# Altium PCB STM32F303VCT6_PLC.PcbDoc (part 1 of 3)
Units mm, origin at the board's own origin, x right, y up, seen from the top; angles counter-clockwise.
Board outline 150 x 150 mm, 4 copper layers ([L1] TOP, [L2] GND, [L3] POWER, [L4] BOTTOM), stack 1.58 mm thick; 269 components, 235 nets, 934 pads, 331 vias.
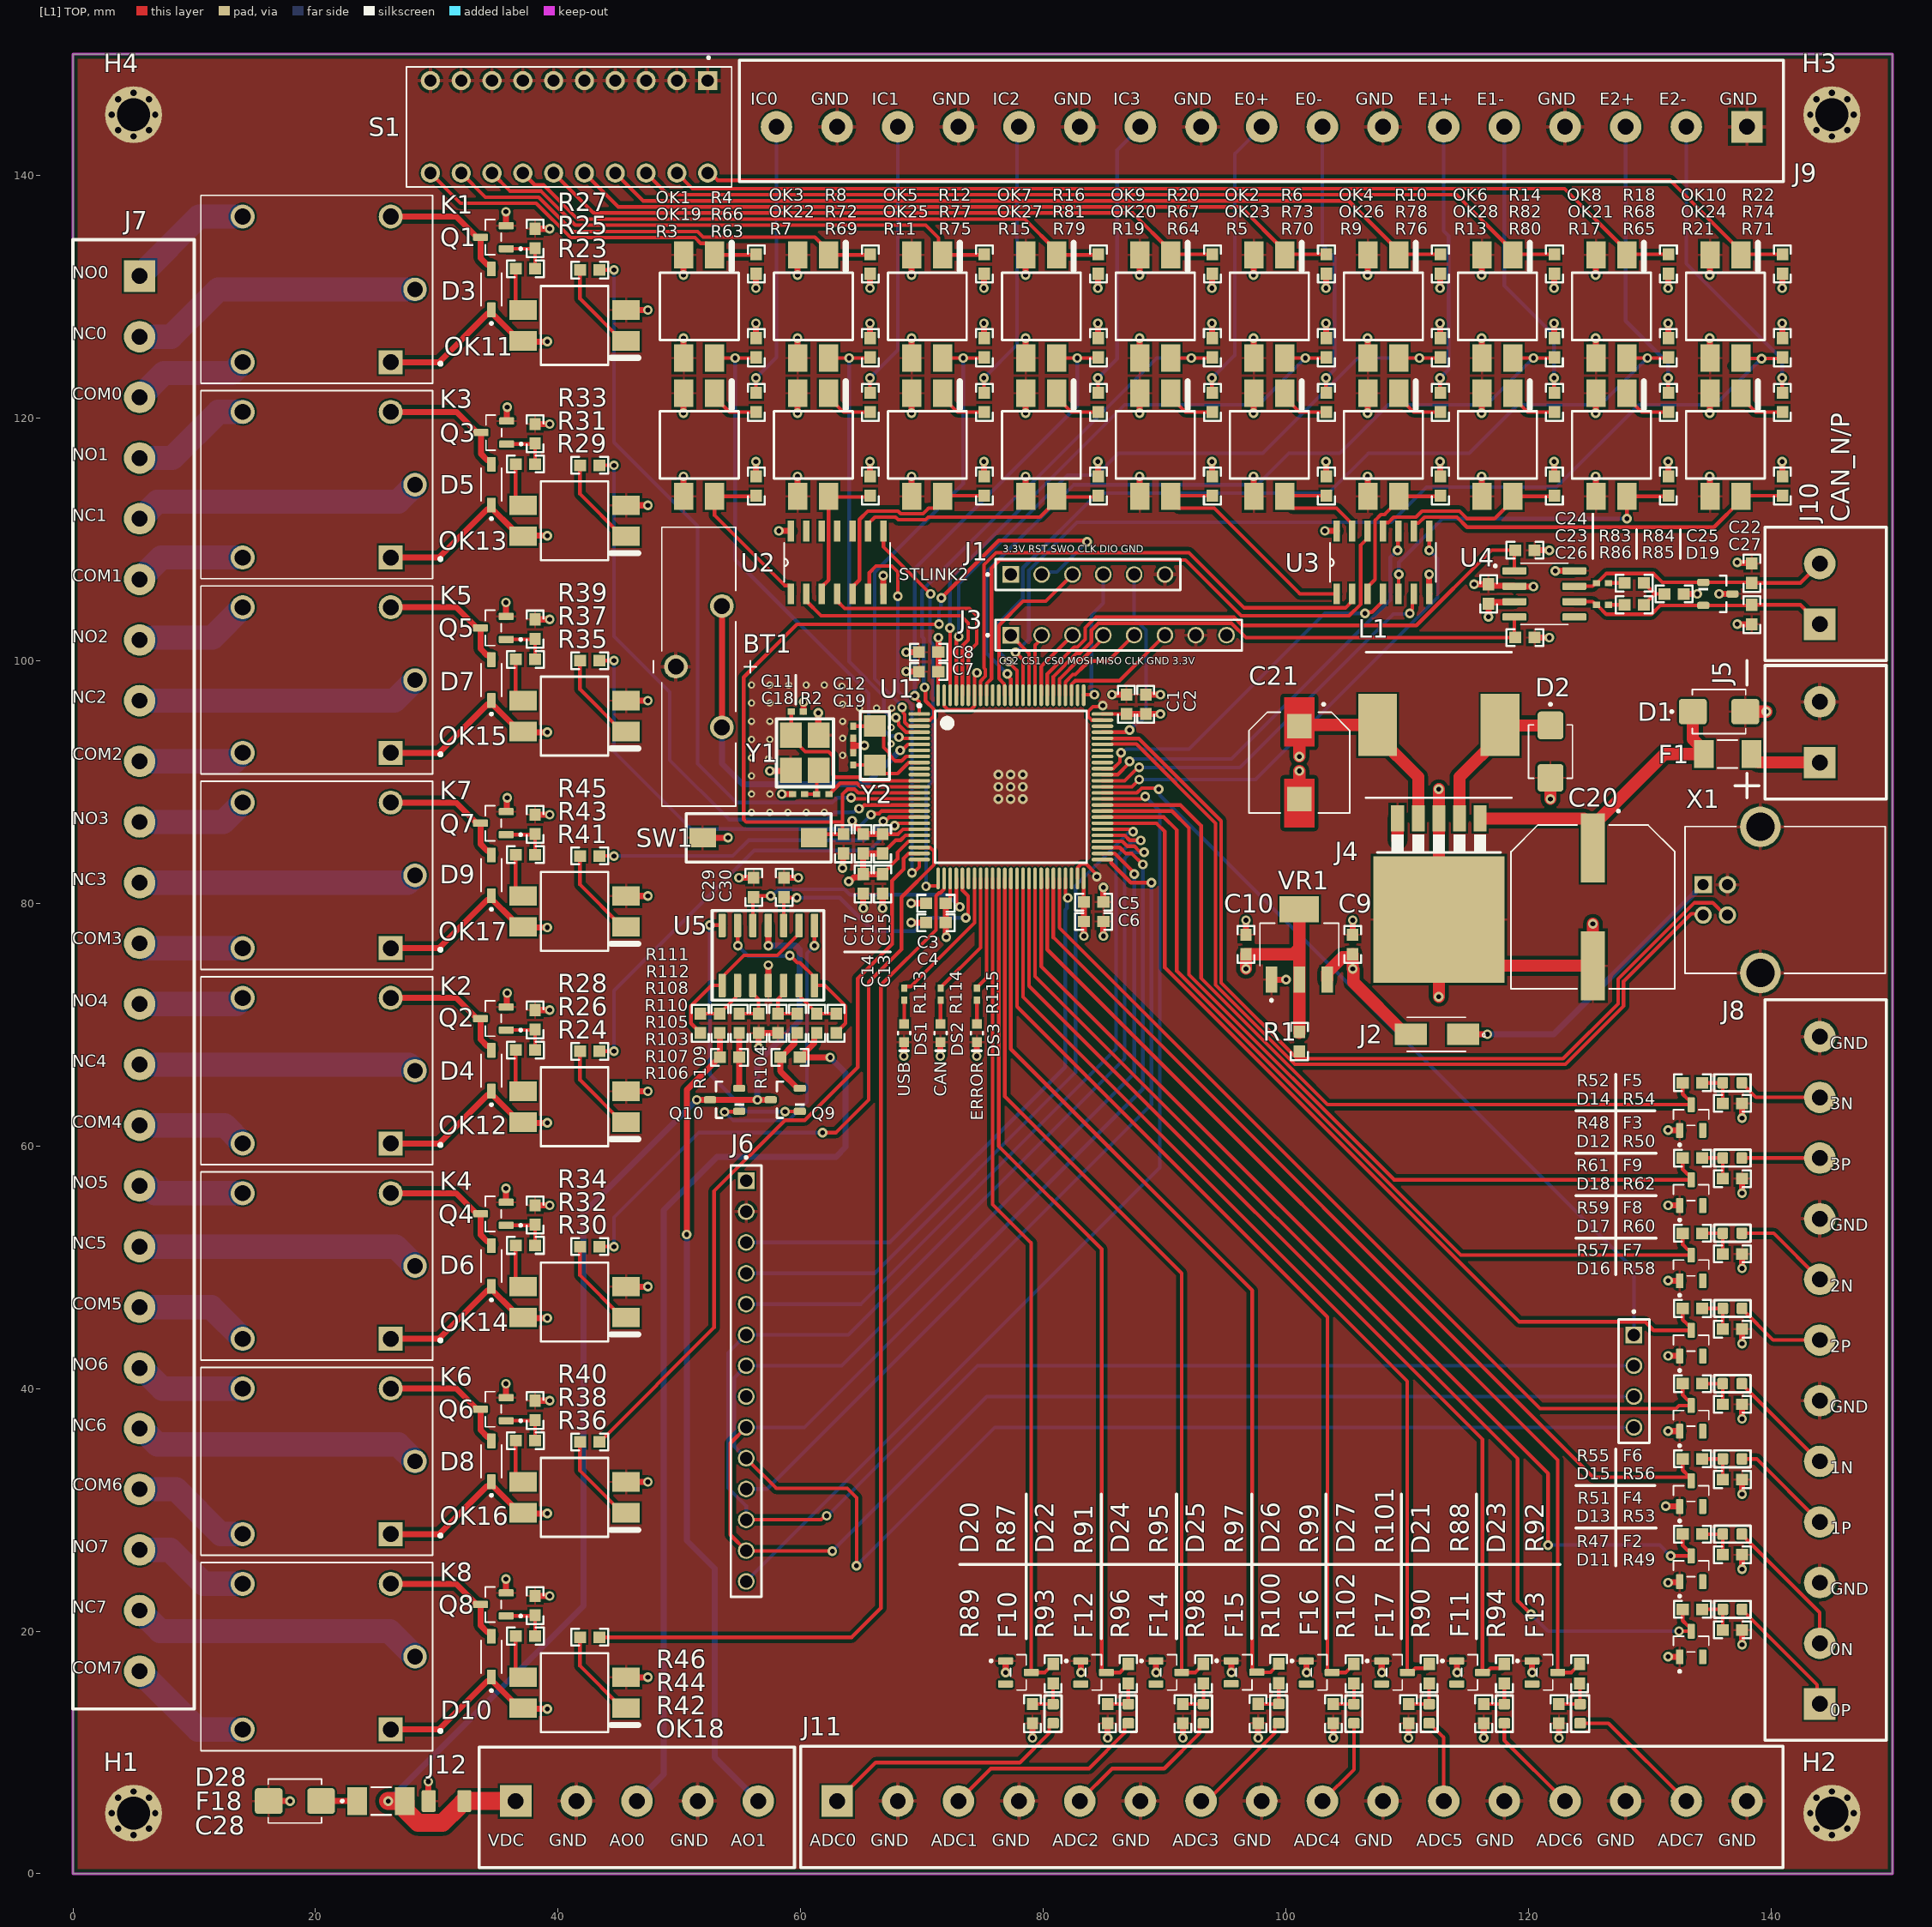
[diagram p0: [L1] TOP view]
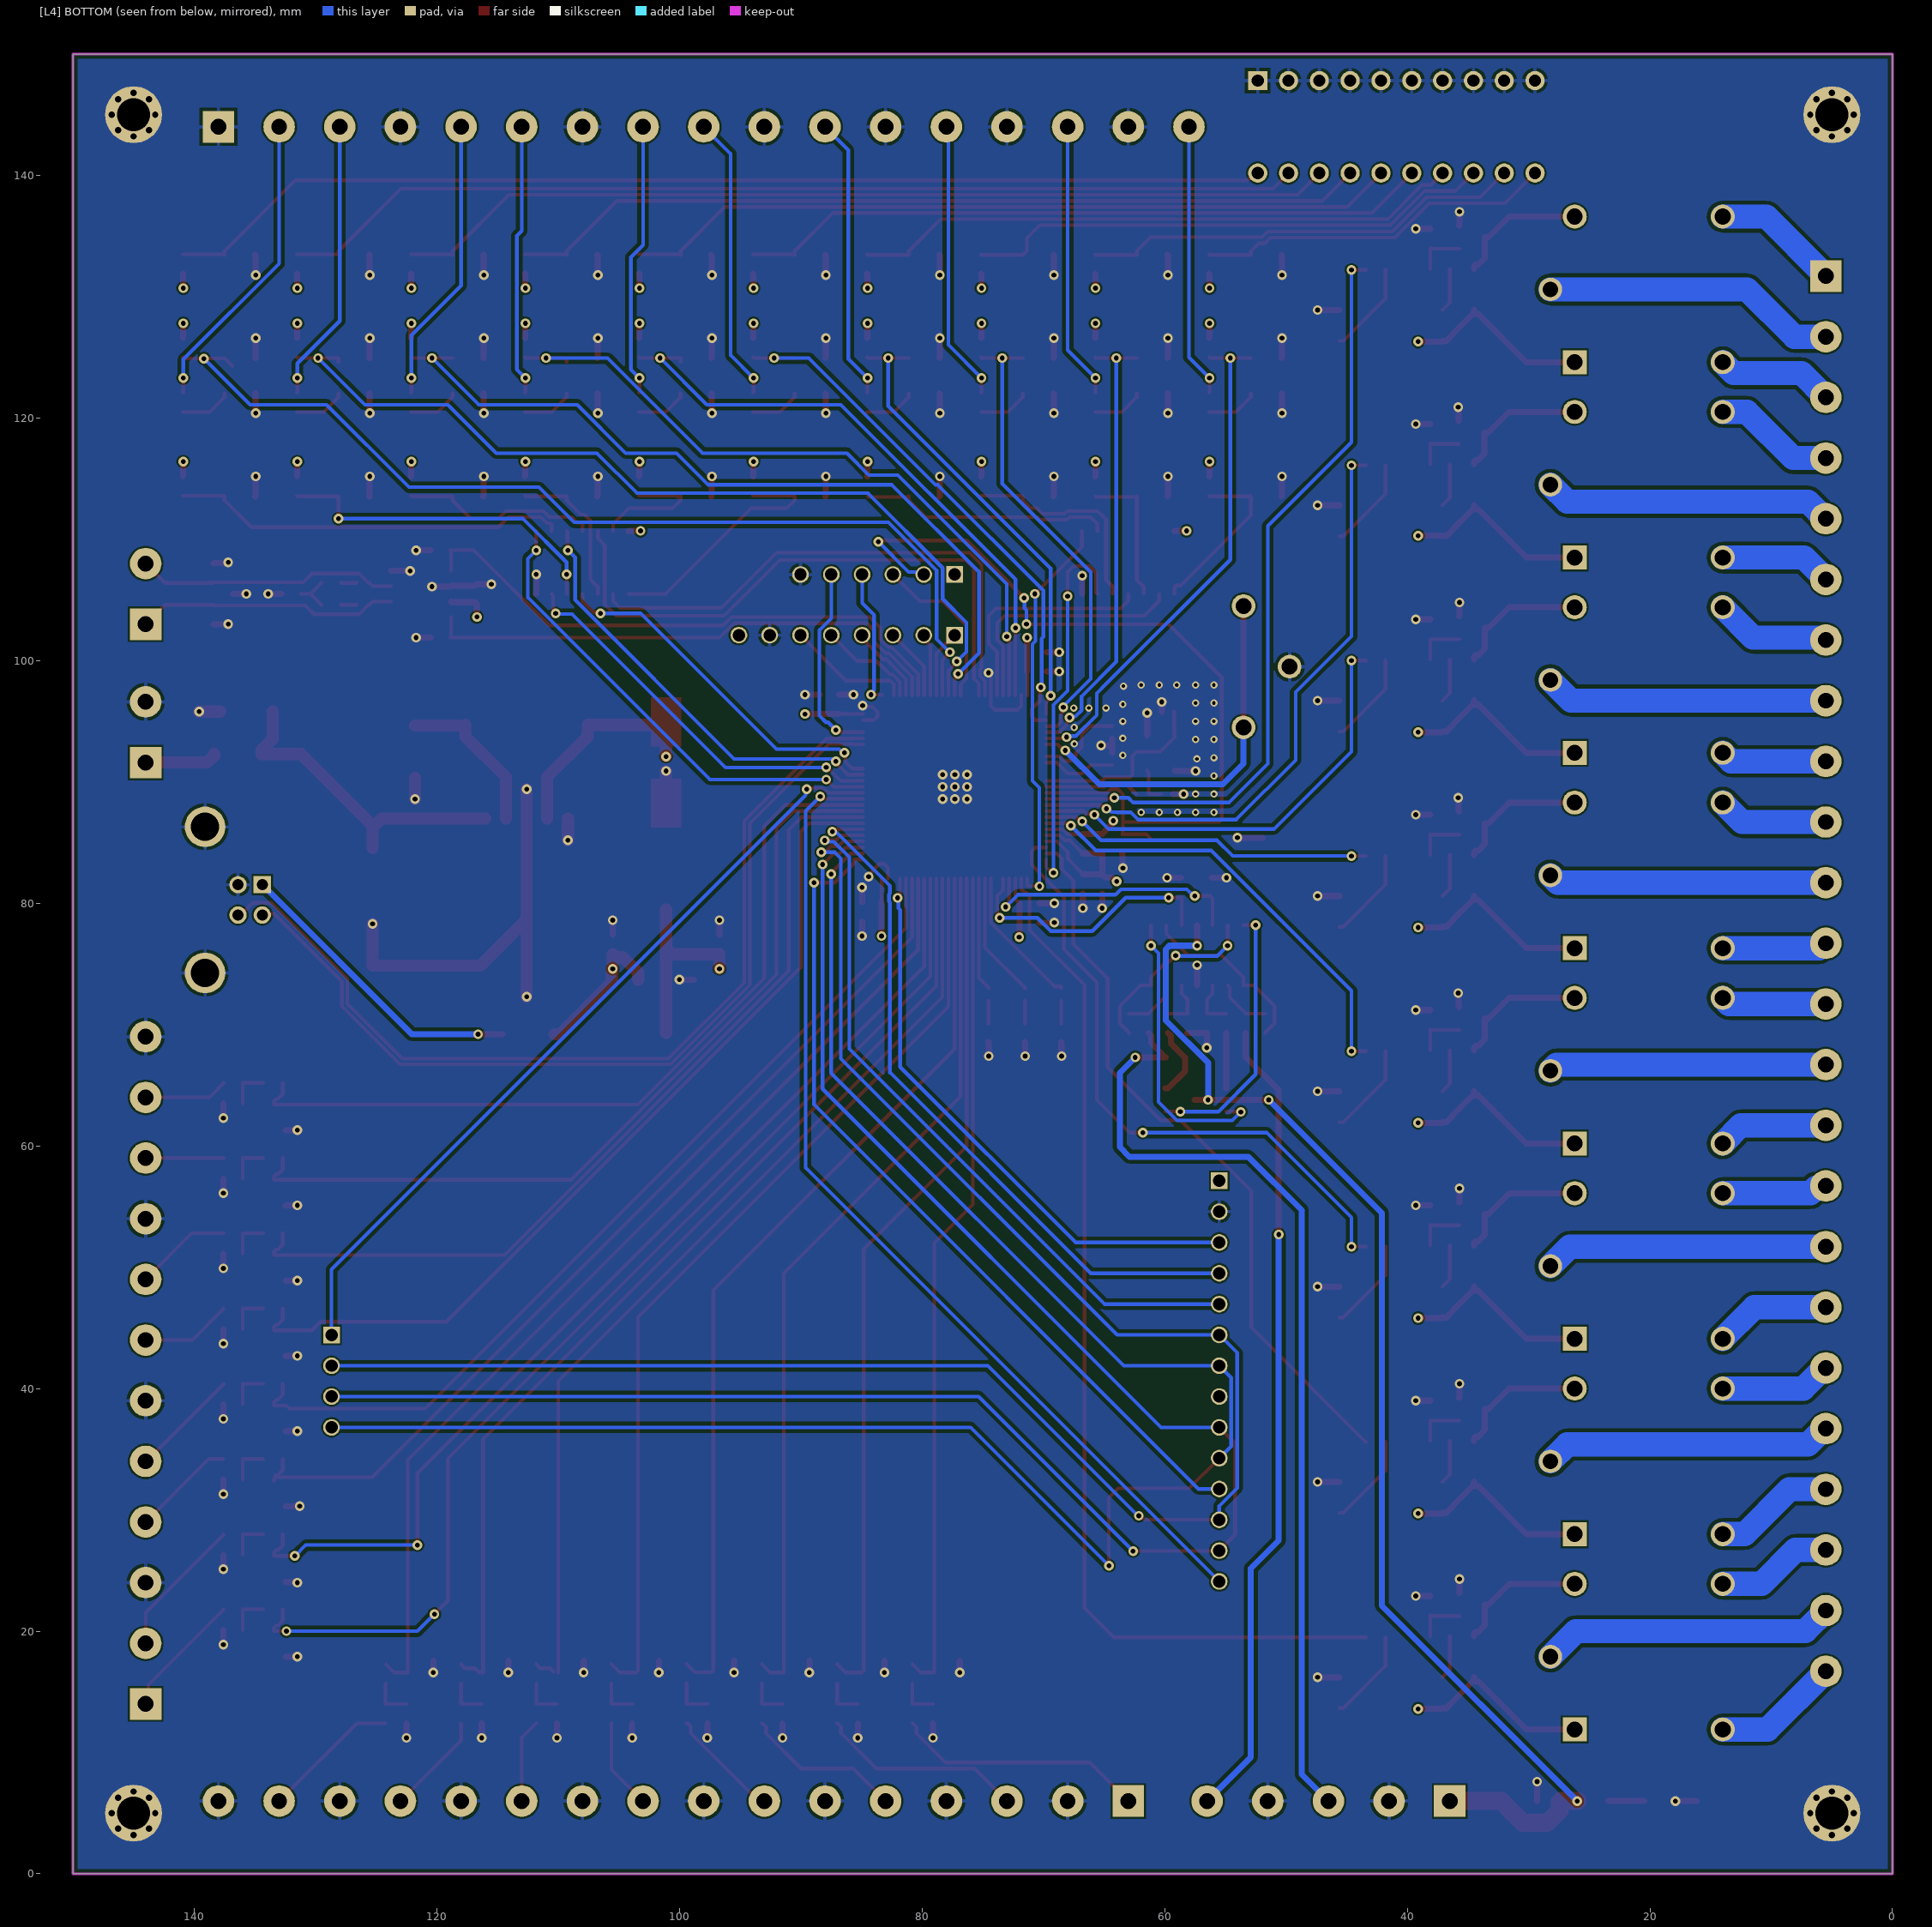
[diagram p1: [L4] BOTTOM view, seen from below]
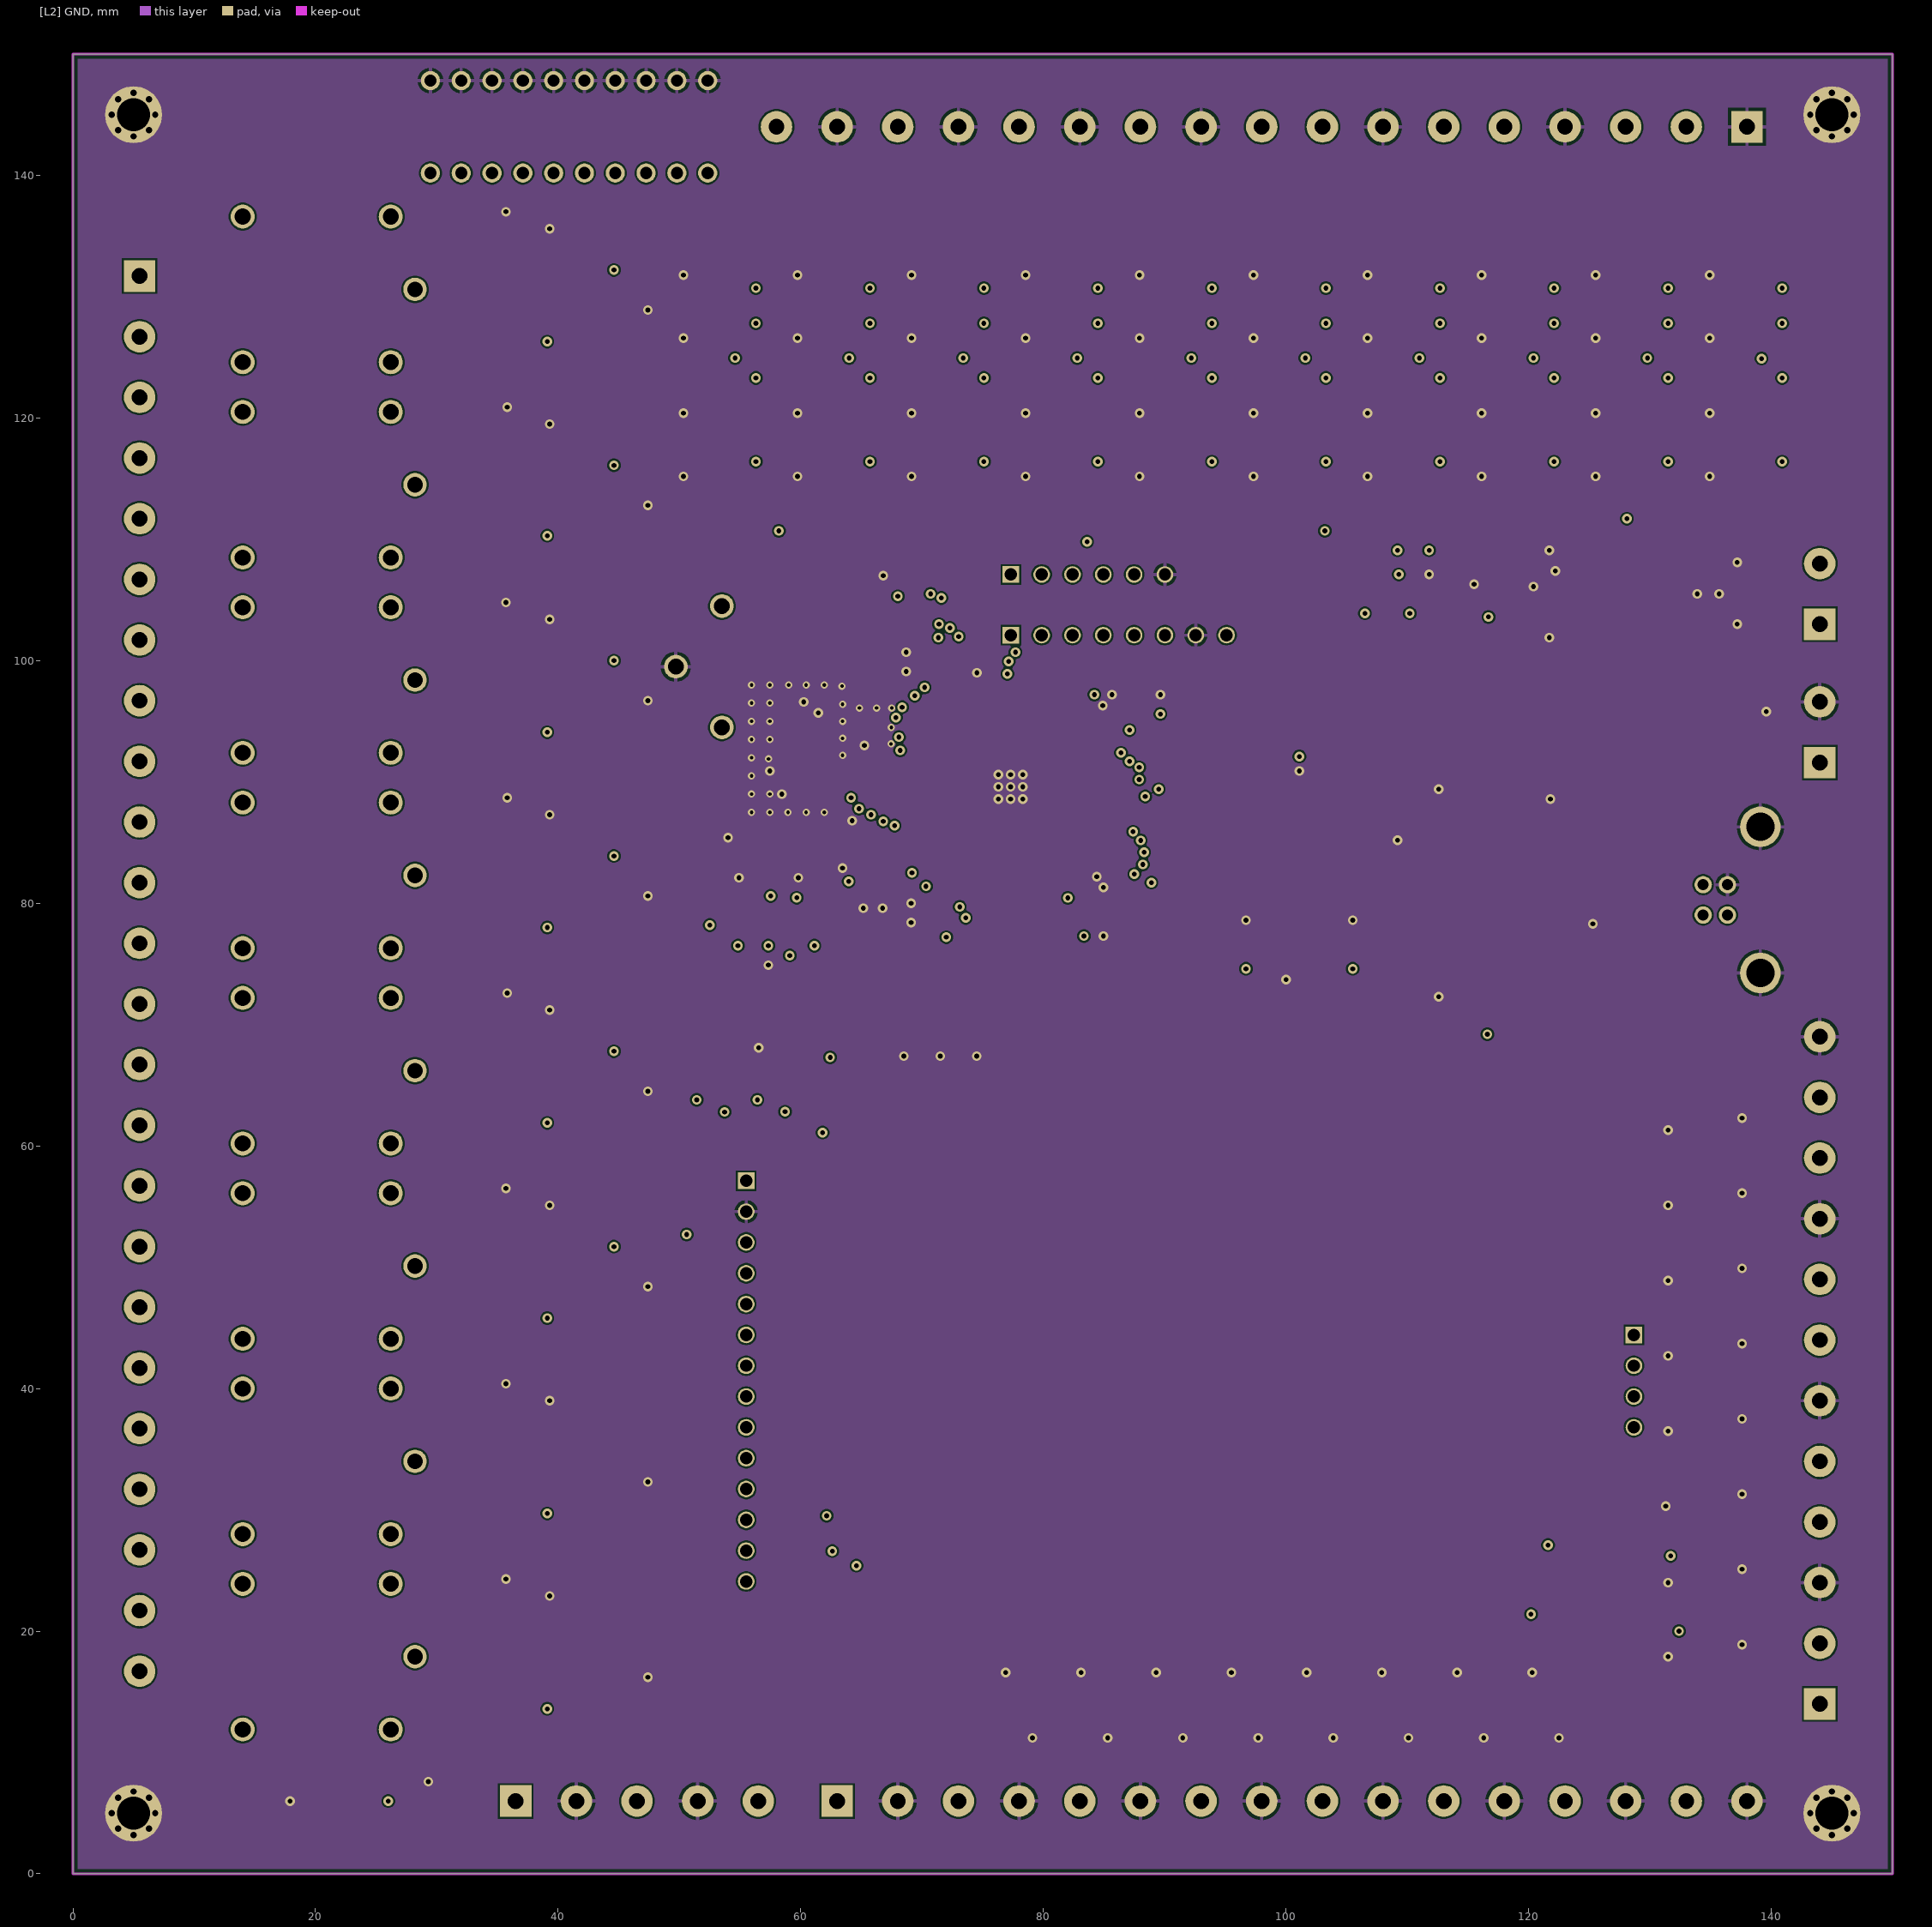
[diagram p2: [L2] GND]
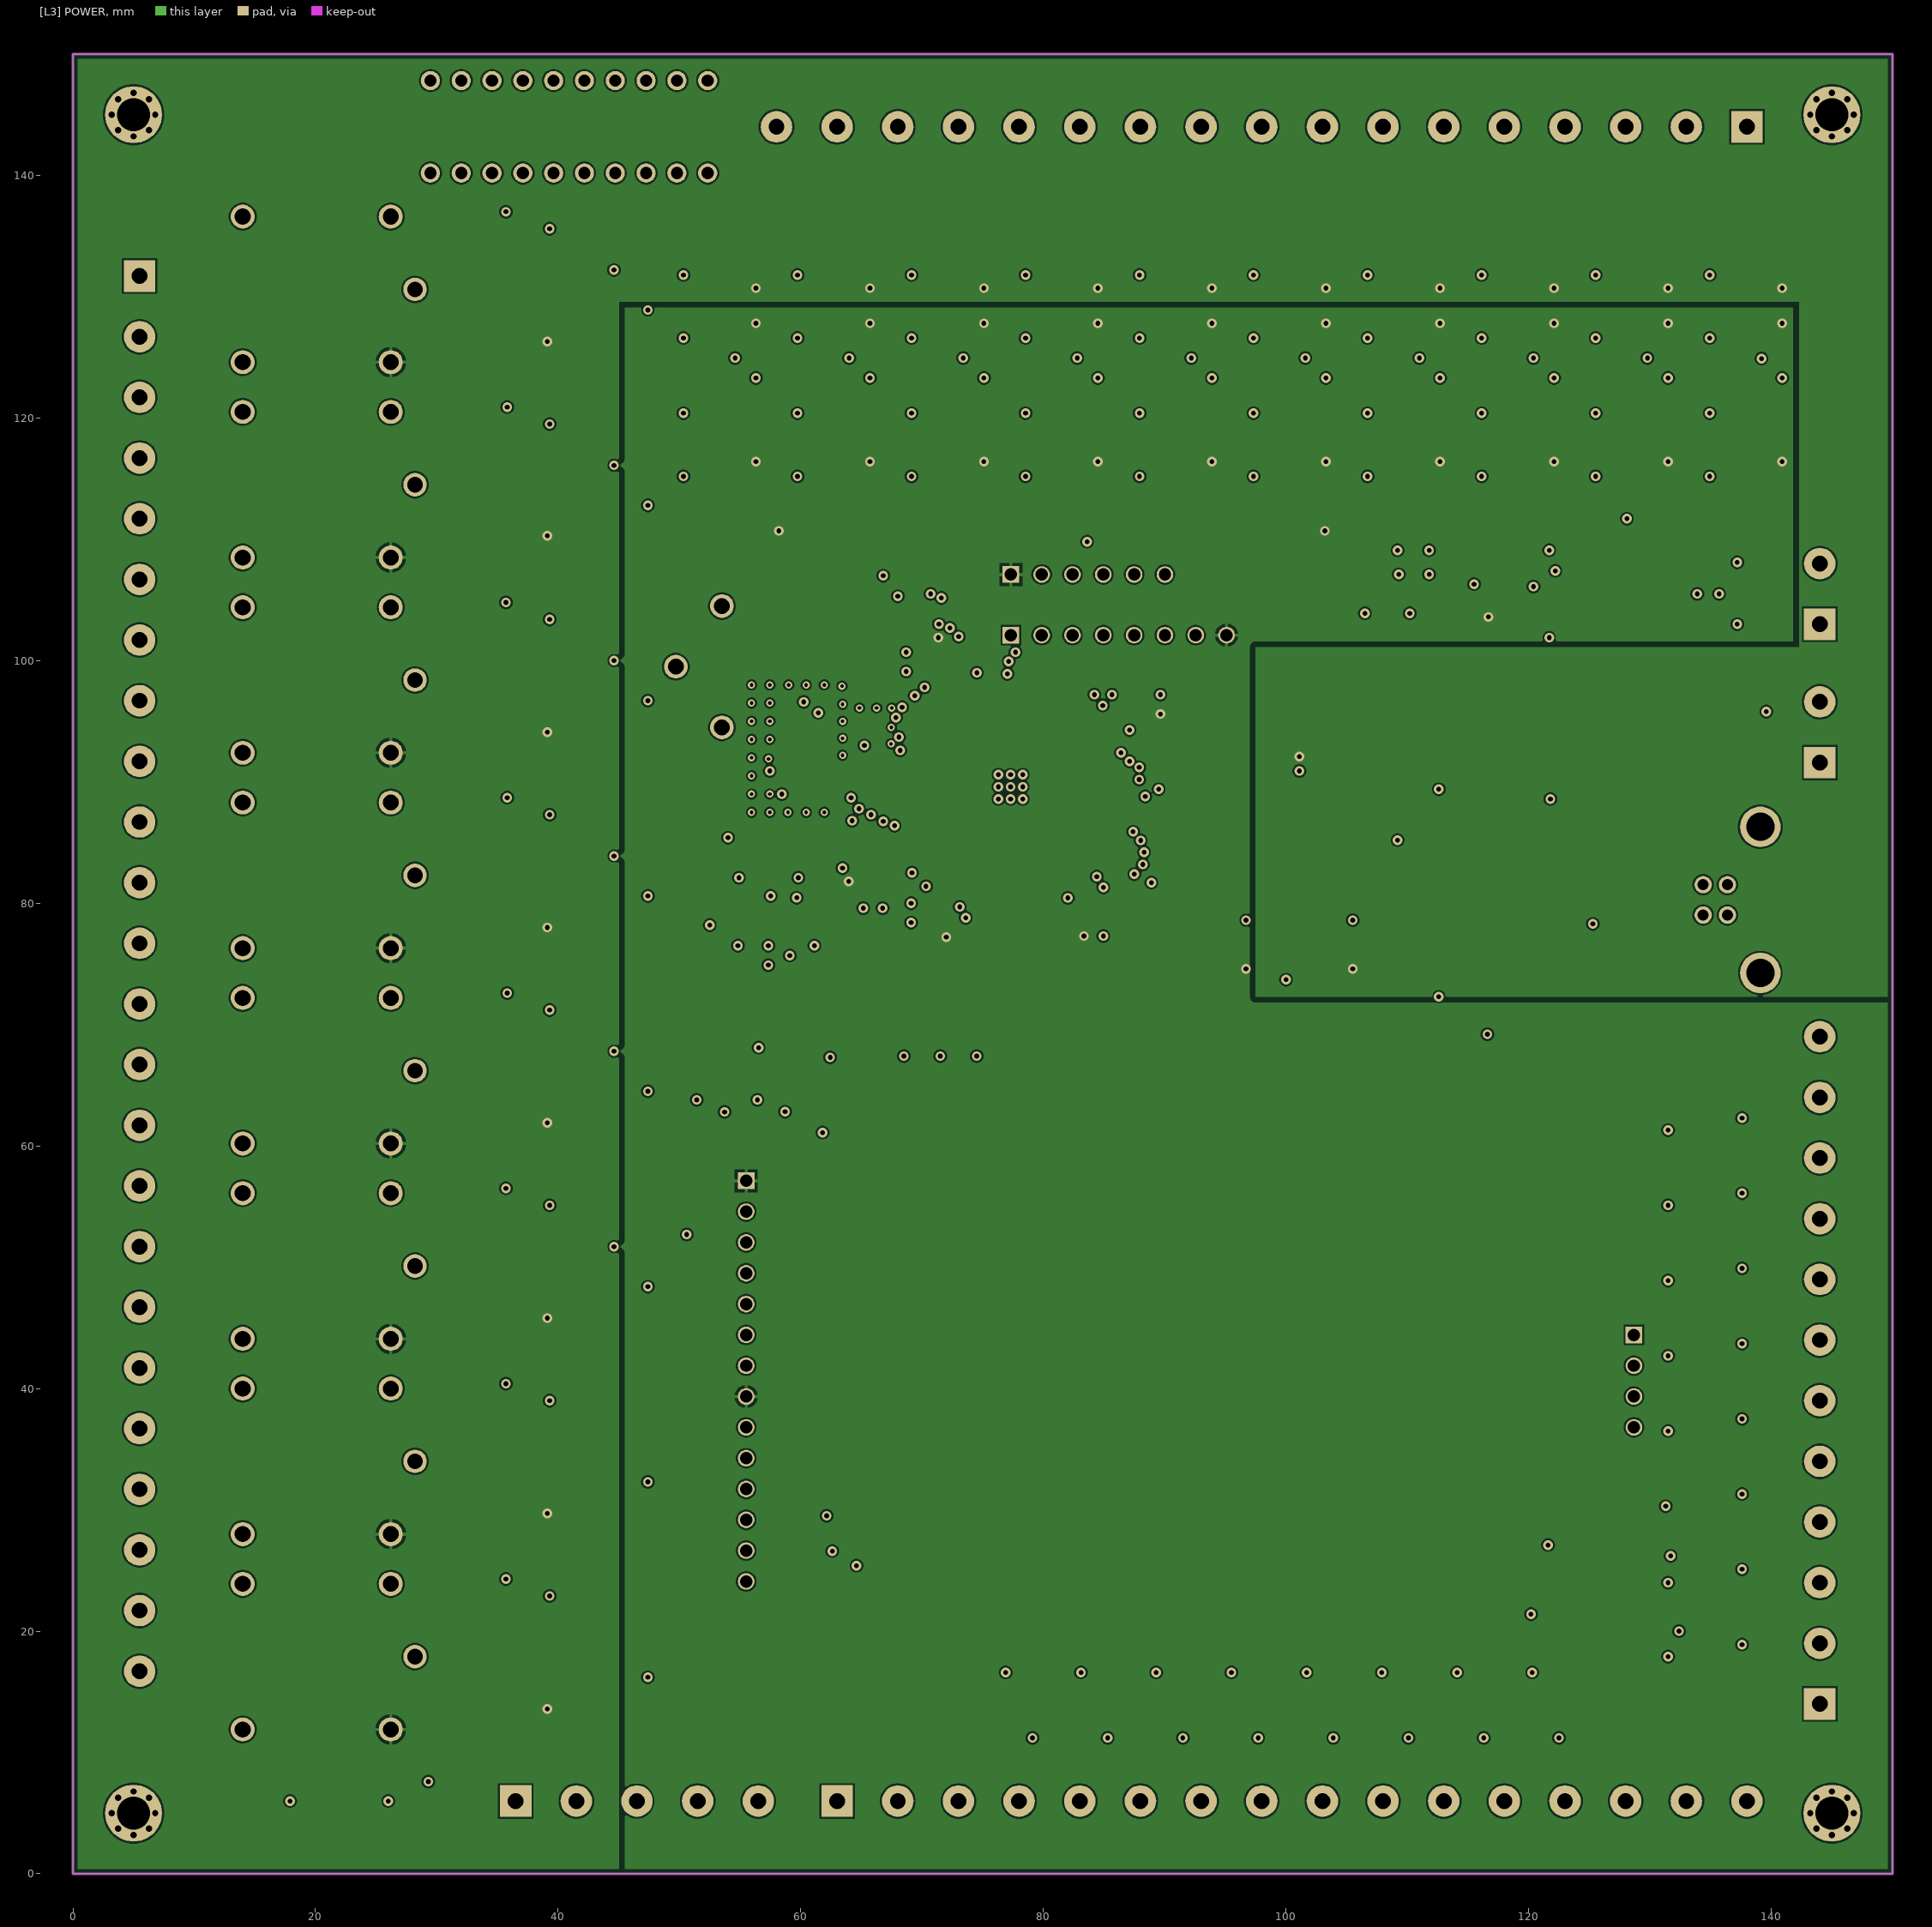
[diagram p3: [L3] POWER]

## Layer stack, top to bottom
Top Solder: solder mask 0.01, Solder Resist, Dk 3.3
[L1] TOP: signal copper 0.035
Dielectric 1: core 0.48, FR-4, Dk 4.5
[L2] GND: signal copper 0.035
Dielectric 2: prepreg 0.48, FR-4, Dk 4.5
[L3] POWER: signal copper 0.035
Dielectric 3: core 0.48, FR-4, Dk 4.5
[L4] BOTTOM: signal copper 0.035
Bottom Solder: solder mask 0.01, Solder Resist, Dk 3.3

## Board outline
0,0 0,150 150,150 150,0

## Design rules (kind name [scope] priority, off if disabled: settings)
Clearance Clearance_ROOM [(WithinRoom('ROOM_MCU')) AND OnLayer('[L1] TOP')AND NOT InDifferentialPairClass('All Differential Pairs')] p1: gap=0.15 ignorepadtopadclearanceinfootprint=TRUE except(0.2: Track-Track Track-Poly Track-Region; 0.3: Fill-Fill Fill-Poly Fill-Region Poly-Poly Poly-Region Region-Region)
Clearance Clearance_DiffPair [(InDifferentialPairClass('All Differential Pairs'))] p2: gap=0.15 ignorepadtopadclearanceinfootprint=FALSE except(0.2: SMDPad-SMDPad; 0.3: Track-Poly Track-Region Fill-Fill Fill-Poly Fill-Region Poly-Poly Poly-Region Region-Region; 0.9: Via-Via)
Clearance [All] p3: gap=0.15 ignorepadtopadclearanceinfootprint=TRUE except(0.2: Track-Track SMDPad-SMDPad; 0.3: Track-Poly Track-Region Fill-Fill Fill-Poly Fill-Region Poly-Region Region-Region; 0.5: Poly-Poly)
DiffPairsRouting DiffPairsRouting_90ohm [InDifferentialPairClass('DIFF90')] p1: maxlimit=0.254 minlimit=0.15 mostfreqgap=0.254 toplayer_maxgap=0.15 toplayer_prefgap=0.15 toplayer_minwidth=0.3 toplayer_maxwidth=0.3 toplayer_prefwidth=0.3 bottomlayer_maxgap=0.15 bottomlayer_prefgap=0.15 bottomlayer_minwidth=0.3 bottomlayer_maxwidth=0.3 bottomlayer_prefwidth=0.3 impedanceprofiledriven=TRUE impedanceprofileid={F8EA241E-8B82-4BE4-9961-83E18E9C677E} impedanceprofilevalue=90.000000 maxuncoupledlength=12.7
HoleSize [All] p1: absolutevalues=TRUE maxlimit=5 minlimit=0.2 maxpercent=80.000 minpercent=20.000
HoleToHoleClearance [All] p1: gap=0.12 allowstackedmicrovias=TRUE
MatchedLengths MatchedLengths_TERMINAL_4_P/N [InxSignalClass('TERMINAL_4_P/N')] p1: tolerance=25.4 checknetsindiffpair=FALSE checkdiffpairvsdiffpair=TRUE checkxsignals=TRUE checkothers=TRUE usedelayunits=TRUE delaytolerance=100.000000
MatchedLengths MatchedLengths_TERMINAL_3_P/N [InxSignalClass('TERMINAL_3_P/N')] p2: tolerance=25.4 checknetsindiffpair=FALSE checkdiffpairvsdiffpair=TRUE checkxsignals=TRUE checkothers=TRUE usedelayunits=TRUE delaytolerance=100.000000
MatchedLengths MatchedLengths_TERMINAL_2_P/N [InxSignalClass('TERMINAL_2_P/N')] p3: tolerance=25.4 checknetsindiffpair=FALSE checkdiffpairvsdiffpair=TRUE checkxsignals=TRUE checkothers=TRUE usedelayunits=TRUE delaytolerance=100.000000
MatchedLengths MatchedLengths_TERMINAL_1_P/N [InxSignalClass('TERMINAL_1_P/N')] p4: tolerance=25.4 checknetsindiffpair=FALSE checkdiffpairvsdiffpair=TRUE checkxsignals=TRUE checkothers=TRUE usedelayunits=TRUE delaytolerance=100.000000
MatchedLengths MatchedLengths_TERMINAL_0_P/N [InxSignalClass('TERMINAL_0_P/N')] p5: tolerance=25.4 checknetsindiffpair=FALSE checkdiffpairvsdiffpair=TRUE checkxsignals=TRUE checkothers=TRUE usedelayunits=TRUE delaytolerance=100.000000
MatchedLengths MatchedLengths_4_P/N [InxSignalClass('4_P/N')] p6: tolerance=25.4 checknetsindiffpair=FALSE checkdiffpairvsdiffpair=TRUE checkxsignals=TRUE checkothers=TRUE usedelayunits=TRUE delaytolerance=100.000000
MatchedLengths MatchedLengths_3_P/N [InxSignalClass('3_P/N')] p7: tolerance=25.4 checknetsindiffpair=FALSE checkdiffpairvsdiffpair=TRUE checkxsignals=TRUE checkothers=TRUE usedelayunits=TRUE delaytolerance=100.000000
MatchedLengths MatchedLengths_2_P/N [InxSignalClass('2_P/N')] p8: tolerance=25.4 checknetsindiffpair=FALSE checkdiffpairvsdiffpair=TRUE checkxsignals=TRUE checkothers=TRUE usedelayunits=TRUE delaytolerance=100.000000
MatchedLengths MatchedLengths_1_P/N [InxSignalClass('1_P/N')] p9: tolerance=25.4 checknetsindiffpair=FALSE checkdiffpairvsdiffpair=TRUE checkxsignals=TRUE checkothers=TRUE usedelayunits=TRUE delaytolerance=100.000000
MatchedLengths MatchedLengths_0_P/N [InxSignalClass('0_P/N')] p10: tolerance=25.4 checknetsindiffpair=FALSE checkdiffpairvsdiffpair=TRUE checkxsignals=TRUE checkothers=TRUE usedelayunits=TRUE delaytolerance=100.000000
MatchedLengths MatchedLengths_E2 [InxSignalClass('E2')] p11: tolerance=25.4 checknetsindiffpair=FALSE checkdiffpairvsdiffpair=TRUE checkxsignals=TRUE checkothers=TRUE usedelayunits=TRUE delaytolerance=100.000000
MatchedLengths MatchedLengths_E2_+/- [InxSignalClass('E2_+/-')] p12: tolerance=25.4 checknetsindiffpair=FALSE checkdiffpairvsdiffpair=TRUE checkxsignals=TRUE checkothers=TRUE usedelayunits=TRUE delaytolerance=100.000000
MatchedLengths MatchedLengths_E1 [InxSignalClass('E1')] p13: tolerance=25.4 checknetsindiffpair=FALSE checkdiffpairvsdiffpair=TRUE checkxsignals=TRUE checkothers=TRUE usedelayunits=TRUE delaytolerance=150.000000
MatchedLengths MatchedLengths_E1_+/- [InxSignalClass('E1_+/-')] p14: tolerance=25.4 checknetsindiffpair=FALSE checkdiffpairvsdiffpair=TRUE checkxsignals=TRUE checkothers=TRUE usedelayunits=TRUE delaytolerance=150.000000
MatchedLengths MatchedLengths_E0 [InxSignalClass('E0')] p15: tolerance=25.4 checknetsindiffpair=FALSE checkdiffpairvsdiffpair=TRUE checkxsignals=TRUE checkothers=TRUE usedelayunits=TRUE delaytolerance=100.000000
MatchedLengths MatchedLengths_E0_+/- [InxSignalClass('E0_+/-')] p16: tolerance=25.4 checknetsindiffpair=FALSE checkdiffpairvsdiffpair=TRUE checkxsignals=TRUE checkothers=TRUE usedelayunits=TRUE delaytolerance=100.000000
MatchedLengths MatchedLengths_USB [InDifferentialPairClass('DIFF90')] p17: tolerance=25.4 checknetsindiffpair=TRUE checkdiffpairvsdiffpair=FALSE checkxsignals=FALSE checkothers=FALSE usedelayunits=TRUE delaytolerance=100.000000
MinimumSolderMaskSliver [All] p1: minsoldermaskwidth=0.12
PolygonConnect PolygonConnect_Direect [InComponent('H1') OR InComponent('H2') OR InComponent('H3') OR InComponent('H4')] p1: connectstyle=Direct reliefconductorwidth=0.254 reliefentries=4 polygonreliefangle="90 Angle" airgapwidth=0.254
PolygonConnect [All] p2: thpad.connectstyle=Relief thpad.reliefconductorwidth=0.3 thpad.reliefentries=4 thpad.polygonreliefangle="90 Angle" thpad.airgapwidth=0.254 smdpad.connectstyle=Relief smdpad.reliefconductorwidth=0.2 smdpad.reliefentries=4 smdpad.polygonreliefangle="90 Angle" smdpad.airgapwidth=0.2 via.connectstyle=Direct via.reliefconductorwidth=0.254 via.reliefentries=4 via.polygonreliefangle="90 Angle" via.airgapwidth=0.254
RoomDefinition ROOM_MCU [False vs False] p1: confinementstyle=ConfineIn formatcopy=TRUE lockcomponents=FALSE outline 64.8,99.9 87.598,99.9 87.598,79.3 64.8,79.3
RoutingVias [All] p1: holewidth=0.4 width=0.8 viastyle="Through Hole" minholewidth=0.2 minwidth=0.4 maxholewidth=0.5 maxwidth=1
SilkToSilkClearance [All] p1: silktosilkclearance=0.12
SilkToSolderMaskClearance [IsPad] p1: minsilkscreentomaskgap=0.12 clearancetoexposedcopper=TRUE
SolderMaskExpansion [All] p1: expansion=0 istentingtop=FALSE
SupplyNets "Schematic Supply Nets_6" [InNet('+VBUS')] p1: voltage=0.000
SupplyNets "Schematic Supply Nets_5" [InNet('+5V')] p2: voltage=0.000
SupplyNets "Schematic Supply Nets_2" [InNet('VDC')] p3: voltage=0.000
SupplyNets "Schematic Supply Nets_1" [InNet('+3.3V')] p4: voltage=0.000
SupplyNets "Schematic Supply Nets" [InNet('GND')] p5: voltage=0.000
Width Width_ROOM [(WithinRoom('ROOM_MCU')) AND OnLayer('[L1] TOP')AND NOT InDifferentialPairClass('All Differential Pairs')] p1: maxlimit=0.5 minlimit=0.3 preferedwidth=0.3
Width Width_POWER [InNetClass('PWR')] p2: maxlimit=10 minlimit=0.2 preferedwidth=0.5
Width [All] p3: maxlimit=10 minlimit=0.15 preferedwidth=0.3
24 further rules are at their usual default settings.

## Classes and differential pairs
differential pair class DIFF90: USB
net class PWR: +3.3V +5V +VBUS GND NetC20_1 NetF1_2 VDC
component class 12_LED: DS1 DS2 DS3 R113 R114 R115
component class 11_DAC: C28 C29 C30 D28 F18 J12 Q9 Q10 R103 R104 R105 R106 R107 R108 R109 R110 R111 R112 U5
component class 10_ADC: D20 D21 D22 D23 D24 D25 D26 D27 F10 F11 F12 F13 F14 F15 F16 F17 J11 R87 R88 R89 R90 R91 R92 R93 R94 R95 R96 R97 R98 R99 R100 R101 R102
component class 09_CAN: C22 C23 C24 C25 C26 C27 D19 J10 R83 R84 R85 R86 U4
component class 08_INPUTCAPTURE_ENCODER: J9 OK19 OK20 OK21 OK22 OK23 OK24 OK25 OK26 OK27 OK28 R63 R64 R65 R66 R67 R68 R69 R70 R71 R72 R73 R74 R75 R76 R77 R78 R79 R80 R81 R82 U2 U3
component class 07_DADC: D11 D12 D13 D14 D15 D16 D17 D18 F2 F3 F4 F5 F6 F7 F8 F9 J8 R47 R48 R49 R50 R51 R52 R53 R54 R55 R56 R57 R58 R59 R60 R61 R62
component class 06_DIGITAL: D3 D4 D5 D6 D7 D8 D9 D10 J7 K1 K2 K3 K4 K5 K6 K7 K8 OK11 OK12 OK13 OK14 OK15 OK16 OK17 OK18 Q1 Q2 Q3 Q4 Q5 Q6 Q7 Q8 R23 R24 R25 R26 R27 R28 R29 R30 R31 R32 R33 R34 R35 R36 R37 R38 R39 R40 R41 R42 R43 R44 R45 R46
component class 05_INPUT: OK1 OK2 OK3 OK4 OK5 OK6 OK7 OK8 OK9 OK10 R3 R4 R5 R6 R7 R8 R9 R10 R11 R12 R13 R14 R15 R16 R17 R18 R19 R20 R21 R22 S1
component class 04_STM32F303VCT6: BT1 C1 C2 C3 C4 C5 C6 C7 C8 C9 C10 C11 C12 C13 C14 C15 C16 C17 C18 C19 C20 C21 D1 D2 F1 H1 H2 H3 H4 J1 J2 J3 J4 J5 J6 L1 R1 R2 SW1 U1 VR1 X1 Y1 Y2
differential pair USB: +USB_P -USB_N

## Components (designator, comment, footprint, x,y, rotation, side; value= is the part's Value field where it differs from the comment)
BT1 "CR2032" BAT_1074 51.6,99.5 r270 top
C1 "CAP 100nF 0603" 0603 86.846,96.4 r90 top value=2.2uF
C2 "CAP 4.7uF 0603" 0603 88.446,96.4 r90 top value=2.2uF
C3 "CAP 100nF 0603" 0603 71.146,80 r180 top value=2.2uF
C4 "CAP 4.7uF 0603" 0603 71.146,78.4 r180 top value=2.2uF
C5 "CAP 100nF 0603" 0603 84.146,80.1 r0 top value=2.2uF
C6 "CAP 4.7uF 0603" 0603 84.146,78.5 r0 top value=2.2uF
C7 "CAP 100nF 0603" 0603 70.546,99.1 r180 top value=2.2uF
C8 "CAP 4.7uF 0603" 0603 70.546,100.7 r180 top value=2.2uF
C9 "GCM188R71C105KA64D" 0603 105.5,76.6 r90 top value=1uF
C10 "GCM188R71C105KA64D" 0603 96.7,76.6 r90 top value=1uF
C11 "CGA2B3X7R1H104K050BB" 0402L 59.72,95.8 r0 top value=0.1uF
C12 "GJM1555C1H4R7BB01D" 0402L 64.32,94.1 r270 top value=4.7pF
C13 "CAP 10nF 0603" 0603 66.746,81.6 r270 top value=2.2uF
C14 "GCM188R71C105KA64D" 0603 65.146,81.6 r270 top value=1uF
C15 "CAP 10nF 0603" 0603 66.746,84.9 r90 top value=2.2uF
C16 "GCM188R71C105KA64D" 0603 65.146,84.9 r90 top value=1uF
C17 "CAP 100nF 0603" 0603 63.52,84.9 r270 top value=2.2uF
C18 "CGA2B3X7R1H104K050BB" 0402L 59.82,89 r180 top value=0.1uF
C19 "GJM1555C1H4R7BB01D" 0402L 64.32,91.9 r90 top value=4.7pF
C20 "680uF" CAP_EEETK1V331AQ 125.3,79.7 r270 top
C21 "220uF" CAP_EEEFT1E471AV 101.1,91.6 r270 top
C22 "CAP 10nF 0603" 0603 138.4,107.2 r270 top value=2.2uF
C23 "CAP 10nF 0603" 0603 116.7,105.5 r270 top value=2.2uF
C24 "CAP 10nF 0603" 0603 119.7,109.1 r180 top value=2.2uF
C25 "CAP 10nF 0603" 0603 132,105.5 r180 top value=2.2uF
C26 "CAP 10nF 0603" 0603 119.7,101.9 r0 top value=2.2uF
C27 "CAP 10nF 0603" 0603 138.4,103.8 r270 top value=2.2uF
C28 "CGA6P1X7R1E106M250AC" C_1206_3216Metric 30.8,6 r180 top value=10uF
C29 "CAP 100nF 0603" 0603 56.124,81.3 r90 top value=2.2uF
C30 "CAP 100nF 0603" 0603 58.624,81.3 r90 top value=2.2uF
D1 "SS24" DIOM5336X265N 135.7,95.8 r0 top
D2 "SS34" DIOM5336X265N 121.8,92.5 r270 top
D3 "1N4148W" SOD3715X135N 34.5,130.6 r90 top
D4 "1N4148W" SOD3715X135N 34.5,66.2 r90 top
D5 "1N4148W" SOD3715X135N 34.5,114.5 r90 top
D6 "1N4148W" SOD3715X135N 34.5,50.1 r90 top
D7 "1N4148W" SOD3715X135N 34.5,98.4 r90 top
D8 "1N4148W" SOD3715X135N 34.5,34 r90 top
D9 "1N4148W" SOD3715X135N 34.5,82.3 r90 top
D10 "1N4148W" SOD3715X135N 34.5,17.9 r90 top
D11 "BZX84C3V6LT1G" SOT95P240X111-3N 133.4,18.94 r90 top
D12 "BZX84C3V6LT1G" SOT95P240X111-3N 133.4,56.14 r90 top
D13 "BZX84C3V6LT1G" SOT95P240X111-3N 133.4,25.14 r90 top
D14 "BZX84C3V6LT1G" SOT95P240X111-3N 133.4,62.34 r90 top
D15 "BZX84C3V6LT1G" SOT95P240X111-3N 133.4,31.34 r90 top
D16 "BZX84C3V6LT1G" SOT95P240X111-3N 133.4,37.54 r90 top
D17 "BZX84C3V6LT1G" SOT95P240X111-3N 133.4,43.74 r90 top
D18 "BZX84C3V6LT1G" SOT95P240X111-3N 133.4,49.94 r90 top
D19 "SM712" SOT-23 135.6,105.5 r0 top
D20 "BZX84C3V6LT1G" SOT95P240X111-3N 77.94,16.6 r0 top
D21 "BZX84C3V6LT1G" SOT95P240X111-3N 115.14,16.6 r0 top
D22 "BZX84C3V6LT1G" SOT95P240X111-3N 84.14,16.6 r0 top
D23 "BZX84C3V6LT1G" SOT95P240X111-3N 121.34,16.6 r0 top
D24 "BZX84C3V6LT1G" SOT95P240X111-3N 90.34,16.6 r0 top
D25 "BZX84C3V6LT1G" SOT95P240X111-3N 96.541,16.613 r0 top
D26 "BZX84C3V6LT1G" SOT95P240X111-3N 102.74,16.6 r0 top
D27 "BZX84C3V6LT1G" SOT95P240X111-3N 108.94,16.6 r0 top
D28 "SS24" DIOM5336X265N 18.3,6 r180 top
DS1 "LS L29K-G1J2-1-Z" "LS L29K_Red" 68.524,69.3 r270 top value=LED_USB
DS2 "LS L29K-G1J2-1-Z" "LS L29K_Red" 71.524,69.3 r270 top value=LED_CAN
DS3 "LS L29K-G1J2-1-Z" "LS L29K_Red" 74.524,69.3 r270 top value=LED_ERROR
F1 "0440005.WR" CAPC4520X203N 136.4,92.3 r0 top
F2 "Max 30mA" Fuse_0603_1608Metric 136.8,21.8 r180 top
F3 "Max 30mA" Fuse_0603_1608Metric 136.787,59 r180 top
F4 "Max 30mA" Fuse_0603_1608Metric 136.787,28 r180 top
F5 "Max 30mA" Fuse_0603_1608Metric 136.787,65.2 r180 top
F6 "Max 30mA" Fuse_0603_1608Metric 136.8,34.2 r180 top
F7 "Max 30mA" Fuse_0603_1608Metric 136.787,40.4 r180 top
F8 "Max 30mA" Fuse_0603_1608Metric 136.8,46.6 r180 top
F9 "Max 30mA" Fuse_0603_1608Metric 136.787,52.8 r180 top
F10 "Max 30mA" Fuse_0603_1608Metric 80.799,13.199 r90 top
F11 "Max 30mA" Fuse_0603_1608Metric 117.999,13.199 r90 top
F12 "Max 30mA" Fuse_0603_1608Metric 86.999,13.199 r90 top
F13 "Max 30mA" Fuse_0603_1608Metric 124.24,13.2 r90 top
F14 "Max 30mA" Fuse_0603_1608Metric 93.199,13.199 r90 top
F15 "Max 30mA" Fuse_0603_1608Metric 99.4,13.213 r90 top
F16 "Max 30mA" Fuse_0603_1608Metric 105.599,13.199 r90 top
F17 "Max 30mA" Fuse_0603_1608Metric 111.8,13.199 r90 top
F18 "0440005.WR" CAPC4520X203N 25.4,6 r0 top
H1 "MountingHole_Pad M2.5" MountingHole_2.7mm_M2.5_DIN965_Pad 5,5 r0 top
H2 "MountingHole_Pad M2.5" MountingHole_2.7mm_M2.5_DIN965_Pad 145,5 r0 top
H3 "MountingHole_Pad M2.5" MountingHole_2.7mm_M2.5_DIN965_Pad 145,145 r0 top
H4 "MountingHole_Pad M2.5" MountingHole_2.7mm_M2.5_DIN965_Pad 5,145 r0 top
J1 "TSW-106-07-L-S" SAMTEC_TSW-106-07-L-S 83.67,107.1 r0 top
J2 "SS14" SMA 112.601,69.2 r180 top
J3 "TSW-108-07-L-S" SAMTEC_TSW-108-07-L-S 86.21,102.1 r0 top
J4 "LM2596" TO263-5 112.601,81.2 r180 top
J5 "Terminal_01x02_P5.00" TerminalBlock_Phoenix_PT-1,5-2-5.0-H_1x02_P5.00mm_Horizontal 144,91.6 r90 top
J6 "ILI9341" ILI9341 55.5,48.23 r270 top
J7 "Terminal_01x24_P5.00" TerminalBlock_Phoenix_PT-1,5-24-5.0-H_1x24_P5.00mm_Horizontal 5.5,131.7 r270 top
J8 "Terminal_01x12_P5.00" TerminalBlock_Phoenix_PT-1,5-12-5.0-H_1x12_P5.00mm_Horizontal 144,14 r90 top
J9 "Terminal_01x17_P5.00" TerminalBlock_Phoenix_PT-1,5-17-5.0-H_1x17_P5.00mm_Horizontal 138,144 r180 top
J10 "Terminal_01x02_P5.00" TerminalBlock_Phoenix_PT-1,5-2-5.0-H_1x02_P5.00mm_Horizontal 144,103 r90 top
J11 "Terminal_01x16_P5.00" TerminalBlock_Phoenix_PT-1,5-16-5.0-H_1x16_P5.00mm_Horizontal 63,6 r0 top
J12 "Terminal_01x5_P5.00" TerminalBlock_Phoenix_PT-1,5-5-5.0-H_1x5_P5.00mm_Horizontal 36.5,6 r0 top
K1 "SRD-05VDC-SL-C" RELAY_SRD-05VDC-SL-C 20.1,130.6 r180 top
K2 "SRD-05VDC-SL-C" RELAY_SRD-05VDC-SL-C 20.1,66.2 r180 top
K3 "SRD-05VDC-SL-C" RELAY_SRD-05VDC-SL-C 20.1,114.5 r180 top
K4 "SRD-05VDC-SL-C" RELAY_SRD-05VDC-SL-C 20.1,50.1 r180 top
K5 "SRD-05VDC-SL-C" RELAY_SRD-05VDC-SL-C 20.1,98.4 r180 top
K6 "SRD-05VDC-SL-C" RELAY_SRD-05VDC-SL-C 20.1,34 r180 top
K7 "SRD-05VDC-SL-C" RELAY_SRD-05VDC-SL-C 20.1,82.3 r180 top
K8 "SRD-05VDC-SL-C" RELAY_SRD-05VDC-SL-C 20.1,17.9 r180 top
L1 "47uH" INDPM120120X800N 112.6,94.7 r180 top
OK1 "PC817C" SOP254P975X460-4N 51.63,129.19 r270 top
OK2 "PC817C" SOP254P975X460-4N 98.63,129.19 r270 top
OK3 "PC817C" SOP254P975X460-4N 61.03,129.19 r270 top
OK4 "PC817C" SOP254P975X460-4N 108.03,129.19 r270 top
OK5 "PC817C" SOP254P975X460-4N 70.43,129.19 r270 top
OK6 "PC817C" SOP254P975X460-4N 117.43,129.19 r270 top
OK7 "PC817C" SOP254P975X460-4N 79.83,129.19 r270 top
OK8 "PC817C" SOP254P975X460-4N 126.83,129.19 r270 top
OK9 "PC817C" SOP254P975X460-4N 89.23,129.19 r270 top
OK10 "PC817C" SOP254P975X460-4N 136.23,129.19 r270 top
OK11 "PC817C" SOP254P975X460-4N 41.35,127.63 r180 top
OK12 "PC817C" SOP254P975X460-4N 41.35,63.23 r180 top
OK13 "PC817C" SOP254P975X460-4N 41.35,111.53 r180 top
OK14 "PC817C" SOP254P975X460-4N 41.35,47.13 r180 top
OK15 "PC817C" SOP254P975X460-4N 41.35,95.43 r180 top
OK16 "PC817C" SOP254P975X460-4N 41.35,31.03 r180 top
OK17 "PC817C" SOP254P975X460-4N 41.35,79.33 r180 top
OK18 "PC817C" SOP254P975X460-4N 41.35,14.93 r180 top
OK19 "PC817C" SOP254P975X460-4N 51.63,117.79 r270 top
OK20 "PC817C" SOP254P975X460-4N 89.23,117.79 r270 top
OK21 "PC817C" SOP254P975X460-4N 126.83,117.79 r270 top
OK22 "PC817C" SOP254P975X460-4N 61.03,117.79 r270 top
OK23 "PC817C" SOP254P975X460-4N 98.63,117.79 r270 top
OK24 "PC817C" SOP254P975X460-4N 136.23,117.79 r270 top
OK25 "PC817C" SOP254P975X460-4N 70.43,117.79 r270 top
OK26 "PC817C" SOP254P975X460-4N 108.03,117.79 r270 top
OK27 "PC817C" SOP254P975X460-4N 79.83,117.79 r270 top
OK28 "PC817C" SOP254P975X460-4N 117.43,117.79 r270 top
Q1 "2N7002" SOT95P240X111-3N 34.66,134.9 r180 top
Q2 "2N7002" SOT95P240X111-3N 34.66,70.5 r180 top
Q3 "2N7002" SOT95P240X111-3N 34.7,118.8 r180 top
Q4 "2N7002" SOT95P240X111-3N 34.66,54.4 r180 top
Q5 "2N7002" SOT95P240X111-3N 34.66,102.7 r180 top
Q6 "2N7002" SOT95P240X111-3N 34.66,38.3 r180 top
Q7 "2N7002" SOT95P240X111-3N 34.66,86.6 r180 top
Q8 "2N7002" SOT95P240X111-3N 34.66,22.2 r180 top
Q9 "BC847" SOT-23 58.724,63.8 r180 top
Q10 "BC847" SOT-23 53.724,63.8 r180 top
R1 "RES 1.5K 0603" 0603 101.1,68.6 r270 top value=20
R2 "CRCW04021K00FKED" 0402L 61.82,89 r0 top value=1.00k
R3 "RES 1.5K 0603" 0603 56.33,132.69 r270 top value=20
R4 "RES 1.5K 0603" 0603 56.33,125.79 r90 top value=20
R5 "RES 1.5K 0603" 0603 103.33,132.69 r270 top value=20
R6 "RES 1.5K 0603" 0603 103.33,125.79 r90 top value=20
R7 "RES 1.5K 0603" 0603 65.73,132.69 r270 top value=20
R8 "RES 1.5K 0603" 0603 65.73,125.79 r90 top value=20
R9 "RES 1.5K 0603" 0603 112.73,132.69 r270 top value=20
R10 "RES 1.5K 0603" 0603 112.73,125.79 r90 top value=20
R11 "RES 1.5K 0603" 0603 75.13,132.69 r270 top value=20
R12 "RES 1.5K 0603" 0603 75.13,125.79 r90 top value=20
R13 "RES 1.5K 0603" 0603 122.13,132.69 r270 top value=20
R14 "RES 1.5K 0603" 0603 122.13,125.79 r90 top value=20
R15 "RES 1.5K 0603" 0603 84.53,132.69 r270 top value=20
R16 "RES 1.5K 0603" 0603 84.53,125.79 r90 top value=20
R17 "RES 1.5K 0603" 0603 131.53,132.69 r270 top value=20
R18 "RES 1.5K 0603" 0603 131.53,125.79 r90 top value=20
R19 "RES 1.5K 0603" 0603 93.93,132.69 r270 top value=20
R20 "RES 1.5K 0603" 0603 93.93,125.79 r90 top value=20
R21 "RES 1.5K 0603" 0603 140.93,132.69 r270 top value=20
R22 "RES 1.5K 0603" 0603 140.93,125.79 r90 top value=20
R23 "RES 10K 0603" 0603 42.6,132.2 r0 top value=20
R24 "RES 10K 0603" 0603 42.6,67.8 r0 top value=20
R25 "RES 10K 0603" 0603 37.3,132.3 r180 top value=20
R26 "RES 10K 0603" 0603 37.3,67.9 r180 top value=20
R27 "RES 10K 0603" 0603 38.1,134.8 r90 top value=20
R28 "RES 10K 0603" 0603 38.1,70.4 r90 top value=20
R29 "RES 10K 0603" 0603 42.6,116.1 r0 top value=20
R30 "RES 10K 0603" 0603 42.6,51.7 r0 top value=20
R31 "RES 10K 0603" 0603 37.3,116.2 r180 top value=20
R32 "RES 10K 0603" 0603 37.3,51.8 r180 top value=20
R33 "RES 10K 0603" 0603 38.1,118.7 r90 top value=20
R34 "RES 10K 0603" 0603 38.1,54.3 r90 top value=20
R35 "RES 10K 0603" 0603 42.6,100 r0 top value=20
R36 "RES 10K 0603" 0603 42.6,35.6 r0 top value=20
R37 "RES 10K 0603" 0603 37.3,100.1 r180 top value=20
R38 "RES 10K 0603" 0603 37.3,35.7 r180 top value=20
R39 "RES 10K 0603" 0603 38.1,102.6 r90 top value=20
R40 "RES 10K 0603" 0603 38.1,38.2 r90 top value=20
R41 "RES 10K 0603" 0603 42.6,83.9 r0 top value=20
R42 "RES 10K 0603" 0603 42.6,19.5 r0 top value=20
R43 "RES 10K 0603" 0603 37.3,84 r180 top value=20
R44 "RES 10K 0603" 0603 37.3,19.6 r180 top value=20
R45 "RES 10K 0603" 0603 38.1,86.5 r90 top value=20
R46 "RES 10K 0603" 0603 38.1,22.1 r90 top value=20
R47 "CRCW060320R0JNEA" 0603 133.5,21.8 r180 top value=20
R48 "CRCW060320R0JNEA" 0603 133.5,59 r180 top value=20
R49 "CRCW060320R0JNEA" 0603 136.8,20.1 r180 top value=20
R50 "CRCW060320R0JNEA" 0603 136.8,57.3 r180 top value=20
R51 "CRCW060320R0JNEA" 0603 133.5,28 r180 top value=20
R52 "CRCW060320R0JNEA" 0603 133.5,65.2 r180 top value=20
R53 "CRCW060320R0JNEA" 0603 136.8,26.3 r180 top value=20
R54 "CRCW060320R0JNEA" 0603 136.8,63.5 r180 top value=20
R55 "CRCW060320R0JNEA" 0603 133.5,34.2 r180 top value=20
R56 "CRCW060320R0JNEA" 0603 136.8,32.5 r180 top value=20
R57 "CRCW060320R0JNEA" 0603 133.5,40.4 r180 top value=20
R58 "CRCW060320R0JNEA" 0603 136.8,38.7 r180 top value=20
R59 "CRCW060320R0JNEA" 0603 133.5,46.6 r180 top value=20
R60 "CRCW060320R0JNEA" 0603 136.8,44.9 r180 top value=20
R61 "CRCW060320R0JNEA" 0603 133.5,52.8 r180 top value=20
R62 "CRCW060320R0JNEA" 0603 136.8,51.1 r180 top value=20
R63 "MCT06030Z0000ZP500" 0603 56.33,114.39 r90 top value=0
R64 "MCT06030Z0000ZP500" 0603 93.93,114.39 r90 top value=0
R65 "MCT06030Z0000ZP500" 0603 131.53,114.39 r90 top value=0
R66 "MCT06030Z0000ZP500" 0603 56.33,121.29 r270 top value=0
R67 "MCT06030Z0000ZP500" 0603 93.93,121.29 r270 top value=0
R68 "MCT06030Z0000ZP500" 0603 131.53,121.29 r270 top value=0
R69 "MCT06030Z0000ZP500" 0603 65.73,114.39 r90 top value=0
R70 "MCT06030Z0000ZP500" 0603 103.33,114.39 r90 top value=0
R71 "MCT06030Z0000ZP500" 0603 140.93,114.39 r90 top value=0
R72 "MCT06030Z0000ZP500" 0603 65.73,121.29 r270 top value=0
R73 "MCT06030Z0000ZP500" 0603 103.33,121.29 r270 top value=0
R74 "MCT06030Z0000ZP500" 0603 140.93,121.29 r270 top value=0
R75 "MCT06030Z0000ZP500" 0603 75.13,114.39 r90 top value=0
R76 "MCT06030Z0000ZP500" 0603 112.73,114.39 r90 top value=0
R77 "MCT06030Z0000ZP500" 0603 75.13,121.29 r270 top value=0
R78 "MCT06030Z0000ZP500" 0603 112.73,121.29 r270 top value=0
R79 "MCT06030Z0000ZP500" 0603 84.53,114.39 r90 top value=0
R80 "MCT06030Z0000ZP500" 0603 122.13,114.39 r90 top value=0
R81 "MCT06030Z0000ZP500" 0603 84.53,121.29 r270 top value=0
R82 "MCT06030Z0000ZP500" 0603 122.13,121.29 r270 top value=0
R83 "ERJ-2GE0R00X" 0402L 126.1,106.4 r180 top value=0
R84 "MCT06030Z0000ZP500" 0603 128.7,106.4 r180 top value=0
R85 "MCT06030Z0000ZP500" 0603 128.7,104.6 r0 top value=0
R86 "ERJ-2GE0R00X" 0402L 126.1,104.6 r0 top value=0
R87 "CRCW060320R0JNEA" 0603 80.8,16.5 r90 top value=20
R88 "CRCW060320R0JNEA" 0603 118,16.5 r90 top value=20
R89 "CRCW060320R0JNEA" 0603 79.1,13.2 r90 top value=20
R90 "CRCW060320R0JNEA" 0603 116.3,13.2 r90 top value=20
R91 "CRCW060320R0JNEA" 0603 87,16.5 r90 top value=20
R92 "CRCW060320R0JNEA" 0603 124.2,16.5 r90 top value=20
R93 "CRCW060320R0JNEA" 0603 85.3,13.2 r90 top value=20
R94 "CRCW060320R0JNEA" 0603 122.5,13.2 r90 top value=20
R95 "CRCW060320R0JNEA" 0603 93.2,16.5 r90 top value=20
R96 "CRCW060320R0JNEA" 0603 91.5,13.2 r90 top value=20
R97 "CRCW060320R0JNEA" 0603 99.401,16.513 r90 top value=20
R98 "CRCW060320R0JNEA" 0603 97.701,13.213 r90 top value=20
R99 "CRCW060320R0JNEA" 0603 105.6,16.5 r90 top value=20
R100 "CRCW060320R0JNEA" 0603 103.9,13.2 r90 top value=20
R101 "CRCW060320R0JNEA" 0603 111.8,16.5 r90 top value=20
R102 "CRCW060320R0JNEA" 0603 110.1,13.2 r90 top value=20
R103 "RES 10K 0603" 0603 59.724,70.1 r270 top value=20
R104 "CRCW060320R0JNEA" 0603 59.124,67.3 r180 top value=20
R105 "RES 10K 0603" 0603 58.124,70.1 r90 top value=20
R106 "RES 10K 0603" 0603 62.924,70.1 r90 top value=20
R107 "RES 10K 0603" 0603 61.324,70.1 r270 top value=20
R108 "RES 10K 0603" 0603 54.924,70.1 r270 top value=20
R109 "CRCW060320R0JNEA" 0603 54.124,67.3 r0 top value=20
R110 "RES 10K 0603" 0603 56.524,70.1 r90 top value=20
R111 "RES 10K 0603" 0603 51.724,70.1 r90 top value=20
R112 "RES 10K 0603" 0603 53.324,70.1 r270 top value=20
R113 "CRCW04021K00FKED" 0402L 68.524,72.5 r270 top value=1.00k
R114 "CRCW04021K00FKED" 0402L 71.524,72.5 r270 top value=1.00k
R115 "CRCW04021K00FKED" 0402L 74.524,72.5 r270 top value=1.00k
S1 "DIP SWITCH" SW_DS01-254-L-10BE 40.9,144 r180 top
SW1 "SW_Push 3X6x2.5MM" SW_SPST_FSMSM 56.5,85.4 r0 top
U1 "STM32F303VCT6" STM-LQFP100_N 77.32,89.6 r0 top
U2 "74HC14D" SOIC127P600X175-14N 63,108.09 r90 top
U3 "74HC14D" SOIC127P600X175-14N 108,108.09 r90 top
U4 "SN65HVD230DR" SOIC127P599X175-8N 121.3,105.5 r0 top
U5 "LM2902" SOIC-14_3.9x8.7mm_P1.27mm 57.324,75.7 r270 top
VR1 "LM1117IMP-3.3/NOPB" VREG_LM1117IMP-3.3/NOPB 101.1,76.6 r90 top
X1 "USB-B1HSB6" OST_USB-B1HSB6 139.1,80.28 r90 top
Y1 "Crystal 8MHz 3225" Crystal_SMD_3225-4Pin_3.2x2.5mm_HandSoldering 60.32,92.4 r270 top
Y2 "Crystal 32.768KHz 3215" Crystal_SMD_EuroQuartz_EQ161-2Pin_3.2x1.5mm_HandSoldering 66.12,93 r270 top

## Footprints (in the part's own frame and the unit in brackets; to place one, negate y for a bottom-side part, rotate by r counter-clockwise, add the part's x,y. Pads: shape width x height; smd on the part's side, far side on the other; paste and mask are expansions set on the pad)
0402L [mm] "0402 from SM-752 data"
  rect 0.6x0.5 smd: 1(-0.5,0) 2(0.5,0)
  body extent -0.55,-0.3 0.55,0.3, height 0.6
0603 [mm] "0603 from SM-752 data"
  rect 1x0.95 smd: 1(-0.8,0) 2(0.8,0)
  silkscreen extent -1.52,-0.69 1.52,0.69, body extent -0.87,-0.47 0.87,0.47, height 1
BAT_1074 [mm]
  round 1.95 hole 1.3: N(0,-1.9) P_1(-5,1.9) P_2(5,1.9)
  silkscreen extent -11.5,-3.75 11.5,4.75, body extent -11.5,-3.05 11.49,3.05, height 19.88
C_1206_3216Metric [mm]
  rrect22% 1.15x1.8 smd: 1(-1.475,0) 2(1.475,0)
  body extent -1.6,-0.8 1.6,0.8, height 1.6
CAP_EEEFT1E471AV [mm]
  rect 2x2 smd paste-2 mask+0: 1(-3,0) 2(3,0)
  [L1] TOP region: 3.65,1.25 5.35,1.25 5.35,-1.25 3.65,-1.25 2.35,-1.25 1.35,-1.25 1.35,1.25 2.35,1.25
  [L1] TOP region: -2.35,1.25 -1.35,1.25 -1.35,-1.25 -2.35,-1.25 -3.65,-1.25 -5.35,-1.25 -5.35,1.25 -3.65,1.25
  silkscreen extent -4.9,-4.15 4.15,4.15, body extent -4.85,-4.15 4.85,4.15, height 10.5
CAP_EEETK1V331AQ [mm]
  rect 5.7x2 smd: 1(-4.85,0) 2(4.85,0)
  silkscreen extent -8,-6.75 6.75,6.75, body extent -7.45,-6.75 7.45,6.75, height 13.5
CAPC4520X203N [mil]
  rect 64x90 smd: 1(-77,0) 2(77,0)
  silkscreen extent -32,-45 32,45, body extent -91,-39 91,39, height 57
Crystal_SMD_3225-4Pin_3.2x2.5mm_HandSoldering [mm]
  rect 2.1x1.8 smd: 1(-1.45,-1.15) 2(1.45,-1.15) 3(1.45,1.15) 4(-1.45,1.15)
  body extent -1.6,-1.25 1.6,1.25, height 0.64
Crystal_SMD_EuroQuartz_EQ161-2Pin_3.2x1.5mm_HandSoldering [mm]
  rect 1.75x1.8 smd: 1(-1.625,0) 2(1.625,0)
  body extent -1.6,-0.75 1.6,0.75, height 0.93
DIOM5336X265N [mm]
  rrect25% 2.29x2.12 smd: A(2.16,0) C(-2.16,0)
  silkscreen extent -4,-1.81 2.2,1.81, body extent -2.67,-1.81 2.67,1.81, height 2.65
Fuse_0603_1608Metric [mm]
  rrect25% 0.875x0.95 smd: 1(-0.787,0) 2(0.787,0)
  body extent -0.8,-0.4 0.8,0.4, height 0.45
ILI9341 [mm]
  rect 1.37x1.37 hole 1.02: 01(-8.89,0) 15(3.81,73.18)
  round 1.37 hole 1.02: 02(-6.35,0) 03(-3.81,0) 04(-1.27,0) 05(1.27,0) 06(3.81,0) 07(6.35,0) 08(8.89,0) 09(11.43,0) 10(13.97,0) 11(16.51,0) 12(19.05,0) 13(21.59,0) 14(24.13,0) 16(6.35,73.18) 17(8.89,73.18) 18(11.43,73.18)
  silkscreen extent -10.91,-1.27 25.4,74.45, body extent -13.71,-1.99 28.99,75.17, height 14.3
INDPM120120X800N [mm]
  rect 3.2x5.1 smd: 1(-5.05,0) 2(5.05,0)
  silkscreen extent -6,-6 6,6, body extent -6,-6 6,6, height 8
"LS L29K_Red" [mm] "SMD, 2-Leads, Body 1.3x0.8mm"
  rect 0.8x0.8 smd paste-0.4: 1(-0.75,0) 2(0.75,0)
  silkscreen extent -0.1,-0.5 1.45,0.5, body extent -0.9,-0.45 0.9,0.45, height 0.67
MountingHole_2.7mm_M2.5_DIN965_Pad [mm]
  round 1 hole 0.5: 1(-1.8,0) 1(-1.273,-1.273) 1(-1.273,1.273) 1(0,-1.8) 1(0,1.8) 1(1.273,-1.273) 1(1.273,1.273) 1(1.8,0)
  round 4.7 hole 2.7: 1(0,0)
OST_USB-B1HSB6 [mm]
  rect 1.428x1.428 / inner round 1.428 / far side rect 1.428x1.428 hole 0.92: 1(1.25,4.71)
  round 1.428 hole 0.92: 2(-1.25,4.71) 3(-1.25,2.71) 4(1.25,2.71)
  round 3.346 hole 2.33: P1(-6.02,0) P2(6.02,0)
  silkscreen extent -6.05,-10.3 6.05,6.2, body extent -7.42,-10.25 7.42,6.25, height 10.9
RELAY_SRD-05VDC-SL-C [mm]
  rect 1.98x1.98 / inner round 1.98 / far side rect 1.98x1.98 hole 1.32: A1(-6.1,6)
  round 1.98 hole 1.32: A2(-6.1,-6) NC(6.1,6) NO(6.1,-6)
  round 1.935 hole 1.29: COM(-8.1,0)
  silkscreen extent -10.3,-7.75 9.55,7.75, body extent -9.6,-7.8 9.6,7.8, height 15.8
SAMTEC_TSW-106-07-L-S [mm]
  rect 1.37x1.37 hole 1.02: 01(-6.35,0)
  round 1.37 hole 1.02: 02(-3.81,0) 03(-1.27,0) 04(1.27,0) 05(3.81,0) 06(6.35,0)
  silkscreen extent -8.37,-1.27 7.62,1.27, body extent -7.62,-1.27 7.62,1.27, height 8.54
SAMTEC_TSW-108-07-L-S [mm]
  rect 1.37x1.37 hole 1.02: 01(-8.89,0)
  round 1.37 hole 1.02: 02(-6.35,0) 03(-3.81,0) 04(-1.27,0) 05(1.27,0) 06(3.81,0) 07(6.35,0) 08(8.89,0)
  silkscreen extent -10.91,-1.27 10.16,1.27, body extent -10.16,-1.27 10.16,1.27, height 8.54
SMA [mm]
  rect 2.65x1.75 smd paste+0 mask+0.102: P1(-2,0) P2(2.3,0)
  silkscreen extent -3.84,-1.4 2.6,1.4, body extent -2.6,-1.36 2.6,1.36, height 2.5
SOD3715X135N [mm]
  rrect18% 1.21x0.73 smd paste+0 mask+0.102: A(1.68,0) C(-1.68,0)
  silkscreen extent -2.9,-0.85 1.35,0.85, body extent -1.9,-0.76 1.9,0.84, height 1.1
SOIC127P599X175-8N [mm]
  rrect25% 1.97x0.6 smd: 1(-2.47,1.905) 2(-2.47,0.635) 3(-2.47,-0.635) 4(-2.47,-1.905) 5(2.47,-1.905) 6(2.47,-0.635) 7(2.47,0.635) 8(2.47,1.905)
  silkscreen extent -4.14,-2.52 1.95,2.52, body extent -3,-2.45 3,2.45, height 1.75
SOIC127P600X175-14N [mil]
  rect 67x21 smd: 1(-102,150) 2(-102,100) 3(-102,50) 4(-102,0) 5(-102,-50) 6(-102,-100) 7(-102,-150) 8(102,-150) 9(102,-100) 10(102,-50) 11(102,0) 12(102,50) 13(102,100) 14(102,150)
  silkscreen extent -63,-172 63,172, body extent -118,-170 118,170, height 69
SOIC-14_3.9x8.7mm_P1.27mm [mm]
  rrect25% 1.95x0.6 smd: 1(-2.475,3.81) 2(-2.475,2.54) 3(-2.475,1.27) 4(-2.475,0) 5(-2.475,-1.27) 6(-2.475,-2.54) 7(-2.475,-3.81) 8(2.475,-3.81) 9(2.475,-2.54) 10(2.475,-1.27) 11(2.475,0) 12(2.475,1.27) 13(2.475,2.54) 14(2.475,3.81)
  body extent -3,-4.38 3,4.32, height 1.75
SOP254P975X460-4N [mm]
  rect 2.25x1.6 smd: 1(-4.25,1.27) 2(-4.25,-1.27) 3(4.25,-1.27) 4(4.25,1.27)
  silkscreen extent -5.25,-3.25 2.78,3.25, body extent -5,-2.29 5,2.29, height 4
SOT95P240X111-3N [mm]
  rrect25% 1.23x0.6 smd: 1(-1.06,0.95) 2(-1.06,-0.95) 3(1.06,0)
  silkscreen extent -2.35,-1.45 0.65,1.45, body extent -1.2,-1.45 1.2,1.45, height 1.11
SOT-23 [mm] "SOT23, 3-Leads, Body 2.9x1.3mm, Pitch 0.95mm, Lead Span 2.5mm, IPC Medium Density"
  rrect50% 1x0.6 smd: 1(-1.2,0.95) 2(-1.2,-0.95) 3(1.2,0)
  silkscreen extent -1.62,-1.5 0.7,1.5, body extent -1.16,-1.45 1.21,1.45, height 1
STM-LQFP100_N [mm] "Thin QFP, 100-Leads, Body 14x14mm, Pitch 0.5mm, IPC Medium Density"
  oval 1.8x0.3 smd: 1(-7.55,6) 2(-7.55,5.5) 3(-7.55,5) 4(-7.55,4.5) 5(-7.55,4) 6(-7.55,3.5) 7(-7.55,3) 8(-7.55,2.5) 9(-7.55,2) 10(-7.55,1.5) 11(-7.55,1) 12(-7.55,0.5) 13(-7.55,0) 14(-7.55,-0.5) 15(-7.55,-1) 16(-7.55,-1.5) 17(-7.55,-2) 18(-7.55,-2.5) 19(-7.55,-3) 20(-7.55,-3.5) 21(-7.55,-4) 22(-7.55,-4.5) 23(-7.55,-5) 24(-7.55,-5.5) 25(-7.55,-6) 51(7.55,-6) 52(7.55,-5.5) 53(7.55,-5) 54(7.55,-4.5) 55(7.55,-4) 56(7.55,-3.5) 57(7.55,-3) 58(7.55,-2.5) 59(7.55,-2) 60(7.55,-1.5) 61(7.55,-1) 62(7.55,-0.5) 63(7.55,0) 64(7.55,0.5) 65(7.55,1) 66(7.55,1.5) 67(7.55,2) 68(7.55,2.5) 69(7.55,3) 70(7.55,3.5) 71(7.55,4) 72(7.55,4.5) 73(7.55,5) 74(7.55,5.5) 75(7.55,6)
  oval 0.3x1.8 smd: 26(-6,-7.55) 27(-5.5,-7.55) 28(-5,-7.55) 29(-4.5,-7.55) 30(-4,-7.55) 31(-3.5,-7.55) 32(-3,-7.55) 33(-2.5,-7.55) 34(-2,-7.55) 35(-1.5,-7.55) 36(-1,-7.55) 37(-0.5,-7.55) 38(0,-7.55) 39(0.5,-7.55) 40(1,-7.55) 41(1.5,-7.55) 42(2,-7.55) 43(2.5,-7.55) 44(3,-7.55) 45(3.5,-7.55) 46(4,-7.55) 47(4.5,-7.55) 48(5,-7.55) 49(5.5,-7.55) 50(6,-7.55) 76(6,7.55) 77(5.5,7.55) 78(5,7.55) 79(4.5,7.55) 80(4,7.55) 81(3.5,7.55) 82(3,7.55) 83(2.5,7.55) 84(2,7.55) 85(1.5,7.55) 86(1,7.55) 87(0.5,7.55) 88(0,7.55) 89(-0.5,7.55) 90(-1,7.55) 91(-1.5,7.55) 92(-2,7.55) 93(-2.5,7.55) 94(-3,7.55) 95(-3.5,7.55) 96(-4,7.55) 97(-4.5,7.55) 98(-5,7.55) 99(-5.5,7.55) 100(-6,7.55)
  silkscreen extent -7.67,-6.25 6.25,6.82, body extent -7,-7 7,7, height 1.6
SW_DS01-254-L-10BE [mm]
  rect 1.58x1.58 / inner round 1.58 / far side rect 1.58x1.58 hole 1: 1A(-11.43,-3.81)
  round 1.58 hole 1: 1B(-11.43,3.81) 2A(-8.89,-3.81) 2B(-8.89,3.81) 3A(-6.35,-3.81) 3B(-6.35,3.81) 4A(-3.81,-3.81) 4B(-3.81,3.81) 5A(-1.27,-3.81) 5B(-1.27,3.81) 6A(1.27,-3.81) 6B(1.27,3.81) 7A(3.81,-3.81) 7B(3.81,3.81) 8A(6.35,-3.81) 8B(6.35,3.81) 9A(8.89,-3.81) 9B(8.89,3.81) 10A(11.43,-3.81) 10B(11.43,3.81)
  silkscreen extent -13.41,-5.8 13.41,4.95, body extent -13.41,-4.95 13.41,4.95, height 5.18
SW_SPST_FSMSM [mm]
  rect 2.18x1.6 smd: 1(-4.59,0) 2(4.59,0)
  body extent -4.5,-1.72 4.5,1.78, height 2
TerminalBlock_Phoenix_PT-1,5-2-5.0-H_1x02_P5.00mm_Horizontal [mm]
  rect 2.6x2.6 hole 1.3: 1(0,0)
  round 2.6 hole 1.3: 2(5,0)
  silkscreen extent -3,-5.5 8,4.5, body extent -2.5,-5 8.07,4, height 11.4
TerminalBlock_Phoenix_PT-1,5-5-5.0-H_1x5_P5.00mm_Horizontal [mm]
  rect 2.6x2.6 hole 1.3: 1(0,0)
  round 2.6 hole 1.3: 2(5,0) 3(10,0) 4(15,0) 5(20,0)
  silkscreen extent -3,-5.5 22.99,4.44, body extent -2.54,-4.94 23.03,4.06, height 11.4
TerminalBlock_Phoenix_PT-1,5-12-5.0-H_1x12_P5.00mm_Horizontal [mm]
  rect 2.6x2.6 hole 1.3: 1(0,0)
  round 2.6 hole 1.3: 2(5,0) 3(10,0) 4(15,0) 5(20,0) 6(25,0) 7(30,0) 8(35,0) 9(40,0) 10(45,0) 11(50,0) 12(55,0)
  silkscreen extent -3,-5.5 58.04,4.5, body extent -2.54,-4.94 58.03,4.06, height 11.4
TerminalBlock_Phoenix_PT-1,5-16-5.0-H_1x16_P5.00mm_Horizontal [mm]
  rect 2.6x2.6 hole 1.3: 1(0,0)
  round 2.6 hole 1.3: 2(5,0) 3(10,0) 4(15,0) 5(20,0) 6(25,0) 7(30,0) 8(35,0) 9(40,0) 10(45,0) 11(50,0) 12(55,0) 13(60,0) 14(65,0) 15(70,0) 16(75,0)
  silkscreen extent -3,-5.5 77.98,4.5, body extent -2.54,-4.94 78.01,4.06, height 11.4
TerminalBlock_Phoenix_PT-1,5-17-5.0-H_1x17_P5.00mm_Horizontal [mm]
  rect 2.6x2.6 hole 1.3: 1(0,0)
  round 2.6 hole 1.3: 2(5,0) 3(10,0) 4(15,0) 5(20,0) 6(25,0) 7(30,0) 8(35,0) 9(40,0) 10(45,0) 11(50,0) 12(55,0) 13(60,0) 14(65,0) 15(70,0) 16(75,0) 17(80,0)
  silkscreen extent -3,-5.5 83.06,4.5, body extent -2.54,-4.94 83.02,4.06, height 11.4
TerminalBlock_Phoenix_PT-1,5-24-5.0-H_1x24_P5.00mm_Horizontal [mm]
  rect 2.6x2.6 hole 1.3: 1(0,0)
  round 2.6 hole 1.3: 2(5,0) 3(10,0) 4(15,0) 5(20,0) 6(25,0) 7(30,0) 8(35,0) 9(40,0) 10(45,0) 11(50,0) 12(55,0) 13(60,0) 14(65,0) 15(70,0) 16(75,0) 17(80,0) 18(85,0) 19(90,0) 20(95,0) 21(100,0) 22(105,0) 23(110,0) 24(115,0)
  silkscreen extent -3,-5.5 118.1,4.5, body extent -2.54,-4.94 117.97,4.06, height 11.4
TO263-5 [mil]
  rect 42x85 smd: 1(-134,-228) 2(-67,-228) 3(0,-228) 4(67,-228) 5(134,-228)
  rect 425.2x409.84 smd: 6(0,100)
  silkscreen extent -201,-176 201,-114, body extent -197,-259 197,331, height 174
VREG_LM1117IMP-3.3/NOPB [mm]
  rect 2.15x0.95 smd: 1(-2.9,2.3) 2(-2.9,0) 3(-2.9,-2.3)
  rect 2.15x3.25 smd: 4(2.9,0)
  silkscreen extent -4.7,-3.25 1.75,3.25, body extent -3.5,-3.25 3.5,3.25, height 1.8